# Altium PCB sensor_PCB2A.PcbDoc
Units mil, origin at the board's own origin, x right, y up, seen from the top; angles counter-clockwise.
Board outline 1930 x 2505 mil, 2 copper layers (Top Layer, Bottom Layer); 1 components, 40 nets, 40 pads, 72 vias.
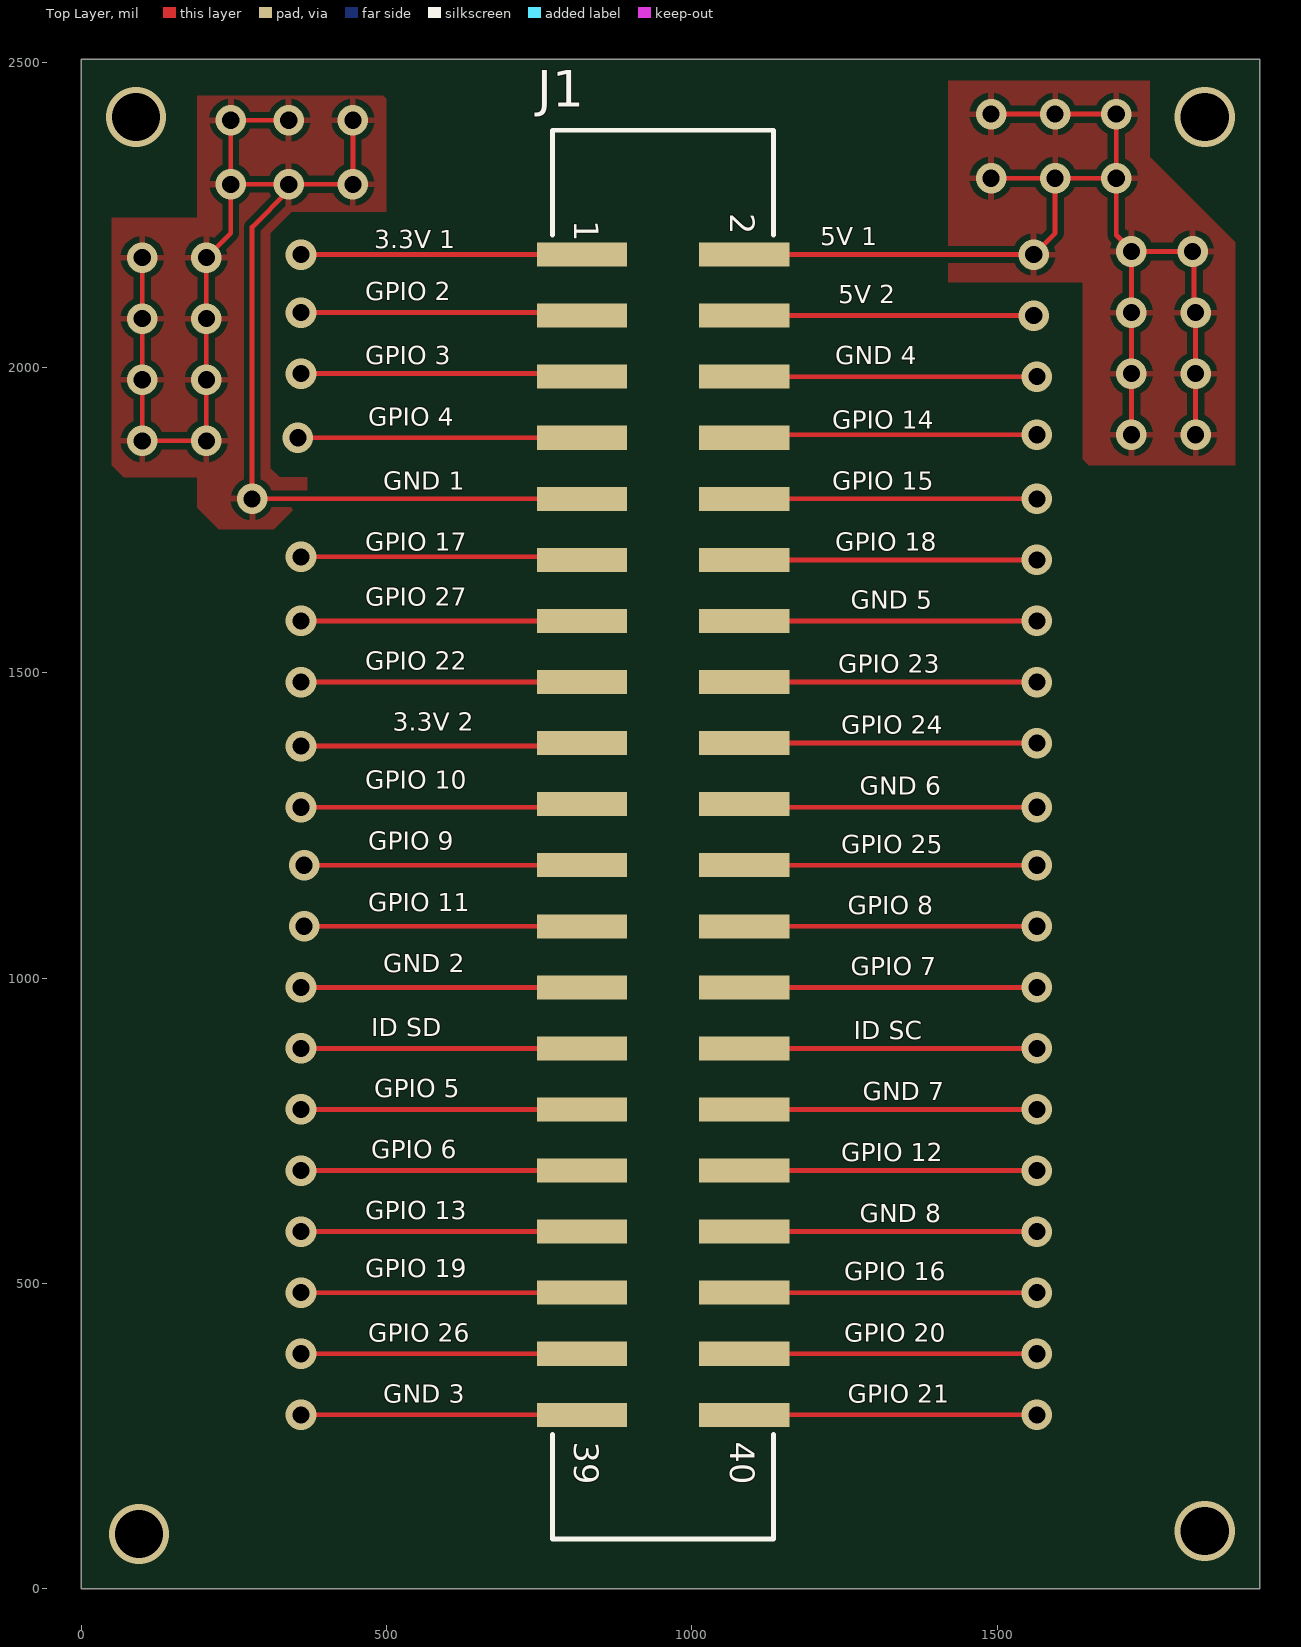
[diagram p0: Top Layer view]
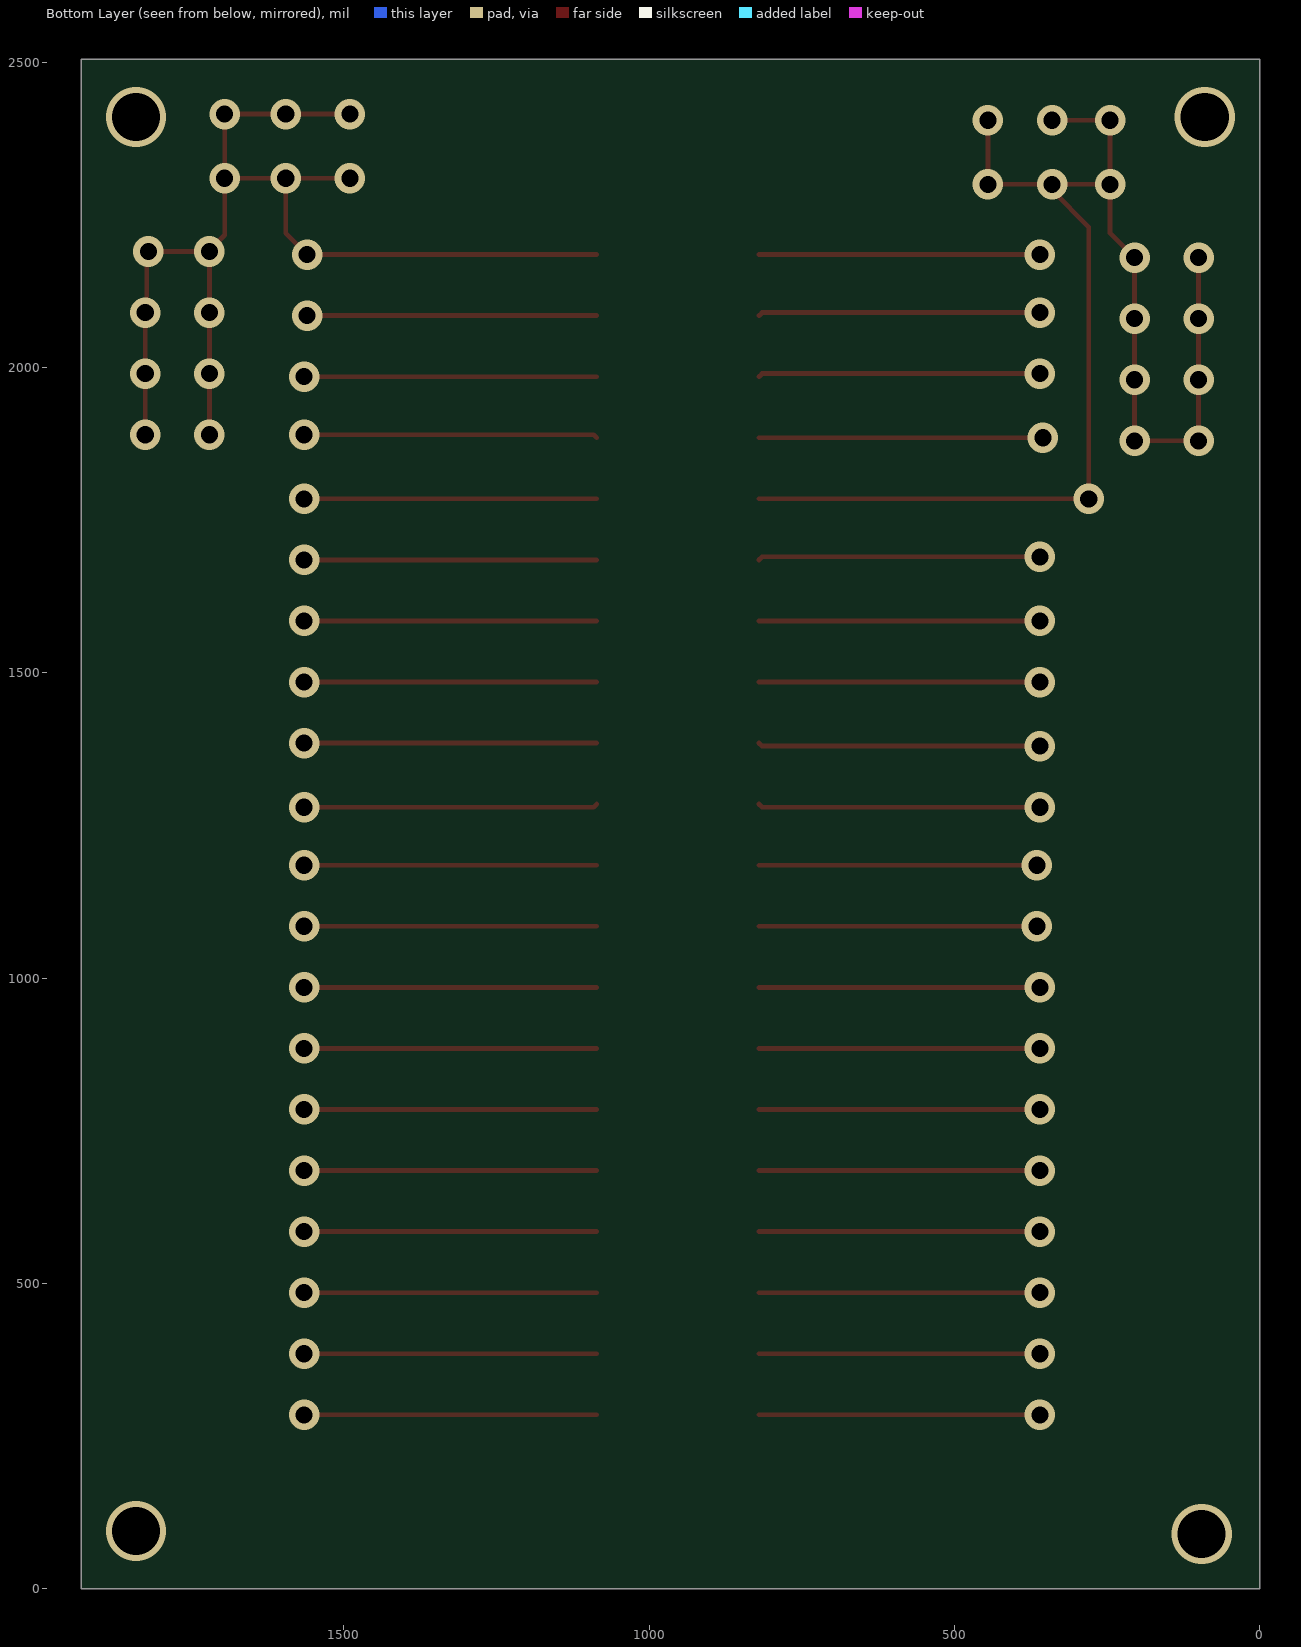
[diagram p1: Bottom Layer view, seen from below]

## Layer stack, top to bottom
Top Solder: solder mask 0.4, Solder Resist, Dk 3.5
Top Layer: signal copper 1.4
Dielectric 1: dielectric 12.6, FR-4, Dk 4.8
Bottom Layer: signal copper 1.4
Bottom Solder: solder mask 0.4, Solder Resist, Dk 3.5

## Board outline
0,0 1930,0 1930,2505 0,2505

## Design rules (kind name [scope] priority, off if disabled: settings)
Clearance [All] p1: gap=9.84 ignorepadtopadclearanceinfootprint=FALSE
NetAntennae [All] p1 off: netantennaetolerance=0
PolygonConnect [All] p1: connectstyle=Relief reliefconductorwidth=10 reliefentries=4 polygonreliefangle="90 Angle" airgapwidth=10
RoutingVias [All] p1: holewidth=28 width=50 viastyle="Through Hole" minholewidth=28 minwidth=50 maxholewidth=28 maxwidth=50
SilkToSolderMaskClearance [IsPad] p1: minsilkscreentomaskgap=8 clearancetoexposedcopper=TRUE
SolderMaskExpansion [All] p1: expansion=4 istentingtop=FALSE
Width [All] p1: maxlimit=7.87 minlimit=3.94 preferedwidth=7.87
28 further rules are at their usual default settings.

## Components (designator, comment, footprint, x,y, rotation, side; value= is the part's Value field where it differs from the comment)
J1 "61234020621" 61234020621 952.87,1235 r270 top

## Footprints (in the part's own frame and the unit in brackets; to place one, negate y for a bottom-side part, rotate by r counter-clockwise, add the part's x,y. Pads: shape width x height; smd on the part's side, far side on the other; paste and mask are expansions set on the pad)
61234020621 [mm] "WR-BHD 2.54mm Male SMT Box Header (Reel), 40p"
  rect 1x3.75 smd: 1(-24.13,-3.375) 2(-24.13,3.375) 3(-21.59,-3.375) 4(-21.59,3.375) 5(-19.05,-3.375) 6(-19.05,3.375) 7(-16.51,-3.375) 8(-16.51,3.375) 9(-13.97,-3.375) 10(-13.97,3.375) 11(-11.43,-3.375) 12(-11.43,3.375) 13(-8.89,-3.375) 14(-8.89,3.375) 15(-6.35,-3.375) 16(-6.35,3.375) 17(-3.81,-3.375) 18(-3.81,3.375) 19(-1.27,-3.375) 20(-1.27,3.375) 21(1.27,-3.375) 22(1.27,3.375) 23(3.81,-3.375) 24(3.81,3.375) 25(6.35,-3.375) 26(6.35,3.375) 27(8.89,-3.375) 28(8.89,3.375) 29(11.43,-3.375) 30(11.43,3.375) 31(13.97,-3.375) 32(13.97,3.375) 33(16.51,-3.375) 34(16.51,3.375) 35(19.05,-3.375) 36(19.05,3.375) 37(21.59,-3.375) 38(21.59,3.375) 39(24.13,-3.375) 40(24.13,3.375)
  silkscreen extent -29.3,-4.6 29.3,4.6, body extent -29.21,-4.75 29.21,4.75, height 10.55

## Part data
J1: library part CMP-1502-00066-1, "Male Box Header WR-BHD, SMT, Vertical, pitch 2.54 mm, 40 pins", Contact Resistance=20mOhm, Manufacturer="Wurth Elektronik", Operating Temperature=-40to125degC, Withstanding Voltage=500VAC, Working Voltage=250VAC, Datasheet URL=https://katalog.we-online.de/em/datasheet/6123xx20621.pdf, Gender=Male, Manufacturer URL=http://www.we-online.de, Mounting Technology=SMT, Orientation=Vertical, Package Reference=61234020621, Packaging=TapeandReel, Part Number=61234020621, Pin Number=40, Pitch=2.54mm, Published Date=August2018, Publisher=WurthElektronik

## Via types
v1: diameter 50, hole 28, Top Layer to Bottom Layer, 68 vias
v2: diameter 98.43, hole 78.74, Top Layer to Bottom Layer, 4 vias

## Nets (pads, with @x,y where several pads share a name; then routed paths per layer and width w, separated by ;. In a path a pad name is that pad's centre, name@x,y a point inside that pad or via, vN(x,y) a via of type N, cw(c..) or ccw(c..) an arc to the next point about the centre after c; other vN are vias at no path point)
3.3V1: J1.1 | length 460
  Top Layer w7.87: v1(360,2185) J1.1
3.3V2: J1.17 | length 462.1
  Top Layer w7.87: v1(360,1380) 815,1380 J1.17
5V1: J1.2 | length 1944.7
  Top Layer w7.87: J1.2 v1@1540,2185 ; v1(1490,2310) v1(1595,2310) ; v1(1490,2415) v1(1595,2415) v1(1695,2415) v1(1695,2310) ; v1(1560,2185) 1595,2220 v1(1595,2310) ; v1@1717.5,2087.5 v1(1720,2090) ; v1(1720,1890) v1(1720,1990) v1(1720,2090) ; v1(1825,1890) v1(1825,1990) v1(1825,2090) 1822.5,2092.5 1822.5,2187.5 v1(1820,2190) v1(1720,2190) ; v1(1595,2310) v1(1695,2310) ; v1(1695,2310) 1695,2217.06 1720,2192.06 v1(1720,2190) ; v1(1720,2090) v1(1720,2190)
5V2: J1.4 | length 474.3
  Top Layer w7.87: J1.4 v1(1560,2085)
GND1: J1.9 | length 2426.4
  Top Layer w7.87: v1(100,2180) v1(100,2080) v1(100,1980) v1(100,1880) v1(205,1880) v1(205,1980) v1(205,2080) v1(205,2180) 245,2220 v1(245,2300) ; v1(340,2405) v1(245,2405) v1(245,2300) ; v1(445,2405) v1(445,2300) v1(340,2300) ; J1.9 v1(280,1785) 280,2230 340,2290 v1(340,2300) ; v1(245,2300) v1(340,2300)
GND2: J1.25 | length 460
  Top Layer w7.87: v1(360,985) J1.25
GND3: J1.39 | length 450
  Top Layer w7.87: v1@370,285 J1.39
  other v1: 360,285
GND4: J1.6 | length 479.3
  Top Layer w7.87: J1.6 v1(1565,1985)
GND5: J1.14 | length 479.3
  Top Layer w7.87: J1.14 v1(1565,1585)
GND6: J1.20 | length 481.3
  Top Layer w7.87: J1.20 1090.75,1280 v1(1565,1280)
GND7: J1.30 | length 479.3
  Top Layer w7.87: J1.30 v1(1565,785)
GND8: J1.34 | length 479.3
  Top Layer w7.87: J1.34 v1(1565,585)
GPIO2: J1.3 | length 462.1
  Top Layer w7.87: v1(360,2090) 815,2090 J1.3
GPIO3: J1.5 | length 462.1
  Top Layer w7.87: v1(360,1990) 815,1990 J1.5
GPIO4: J1.7 | length 465
  Top Layer w7.87: v1(355,1885) J1.7
GPIO6: J1.31 | length 450
  Top Layer w7.87: v1@370,685 J1.31
  other v1: 360,685
GPIO7: J1.26 | length 479.3
  Top Layer w7.87: J1.26 v1(1565,985)
GPIO8: J1.24 | length 479.3
  Top Layer w7.87: J1.24 v1(1565,1085)
GPIO9: J1.21 | length 455
  Top Layer w7.87: v1(365,1185) J1.21
GPIO10: J1.19 | length 462.1
  Top Layer w7.87: v1(360,1280) 815,1280 J1.19
GPIO11: J1.23 | length 455
  Top Layer w7.87: v1(365,1085) J1.23
GPIO12: J1.32 | length 479.3
  Top Layer w7.87: J1.32 v1(1565,685)
GPIO13: J1.33 | length 450
  Top Layer w7.87: v1@370,585 J1.33
  other v1: 360,585
GPIO14: J1.8 | length 481.3
  Top Layer w7.87: J1.8 1090.75,1890 v1(1565,1890)
GPIO15: J1.10 | length 479.3
  Top Layer w7.87: J1.10 v1(1565,1785)
GPIO16: J1.36 | length 479.3
  Top Layer w7.87: J1.36 v1(1565,485)
GPIO17: J1.11 | length 462.1
  Top Layer w7.87: v1(360,1690) 815,1690 J1.11
GPIO18: J1.12 | length 479.3
  Top Layer w7.87: J1.12 v1(1565,1685)
GPIO19: J1.35 | length 450
  Top Layer w7.87: v1@370,485 J1.35
  other v1: 360,485
GPIO20: J1.38 | length 479.3
  Top Layer w7.87: J1.38 v1(1565,385)
GPIO21: J1.40 | length 479.3
  Top Layer w7.87: J1.40 v1(1565,285)
GPIO22: J1.15 | length 460
  Top Layer w7.87: v1(360,1485) J1.15
GPIO23: J1.16 | length 479.3
  Top Layer w7.87: J1.16 v1(1565,1485)
GPIO24: J1.18 | length 479.3
  Top Layer w7.87: J1.18 v1(1565,1385)
GPIO25: J1.22 | length 479.3
  Top Layer w7.87: J1.22 v1(1565,1185)
GPIO26: J1.37 | length 450
  Top Layer w7.87: v1@370,385 J1.37
  other v1: 360,385
GPIO27: J1.13 | length 460
  Top Layer w7.87: v1(360,1585) J1.13
"GPIO 5": J1.29 | length 450
  Top Layer w7.87: v1@370,785 J1.29
  other v1: 360,785
"ID SC": J1.28 | length 479.3
  Top Layer w7.87: J1.28 v1(1565,885)
"ID SD": J1.27 | length 460
  Top Layer w7.87: v1(360,885) J1.27
copper on no net:
  other v2: 95,90 1840,95 90,2410 1840,2410

## Polygon pours and split planes (outlines as drawn)
GND1 on Top Layer "GND1_L01_P008" (solid, remove dead copper, pour order 8): 190,2445 190,2245 50,2245 50,1840 70,1820 190,1820 190,1770 225,1735 315,1735 370,1790 370,1820 325,1820 310,1835 310,2220 345,2255 500,2255 500,2440 495,2445
5V1 on Top Layer "5V1_L01_P002" (solid, remove dead copper, pour order 2): 1420,2470 1750,2470 1750,2345 1890,2205 1890,1840 1650,1840 1640,1850 1640,2140 1420,2140

## Silkscreen, mask and mechanical layers (free items; w line width, h text height)
Top Overlay:
  text "5V 1" at 1210,2200 h30
  text "3.3V 1" at 480,2195 h30
  text "GPIO 2" at 465,2110 h30
  text "5V 2" at 1240,2105 h30
  text "GPIO 3" at 465,2005 h30
  text "GND 4" at 1235,2005 h30
  text "GPIO 4" at 470,1905 h30
  text "GPIO 14" at 1230,1900 h30
  text "GND 1" at 495,1800 h30
  text "GPIO 15" at 1230,1800 h30
  text "GPIO 17" at 465,1700 h30
  text "GPIO 18" at 1235,1700 h30
  text "GPIO 27" at 465,1610 h30
  text "GND 5" at 1260,1605 h30
  text "GPIO 22" at 465,1505 h30
  text "GPIO 23" at 1240,1500 h30
  text "3.3V 2" at 510,1405 h30
  text "GPIO 24" at 1245,1400 h30
  text "GPIO 10" at 465,1310 h30
  text "GND 6" at 1275,1300 h30
  text "GPIO 9" at 470,1210 h30
  text "GPIO 25" at 1245,1205 h30
  text "GPIO 11" at 470,1110 h30
  text "GPIO 8" at 1255,1105 h30
  text "GND 2" at 495,1010 h30
  text "GPIO 7" at 1260,1005 h30
  text "ID SD" at 475,905 h30
  text "ID SC" at 1265,900 h30
  text "GPIO 5" at 480,805 h30
  text "GND 7" at 1280,800 h30
  text "GPIO 6" at 475,705 h30
  text "GPIO 12" at 1245,700 h30
  text "GPIO 13" at 465,605 h30
  text "GND 8" at 1275,600 h30
  text "GPIO 19" at 465,510 h30
  text "GPIO 16" at 1250,505 h30
  text "GPIO 26" at 470,405 h30
  text "GPIO 20" at 1250,405 h30
  text "GND 3" at 495,305 h30
  text "GPIO 21" at 1255,305 h30

## Text inside footprints (layer, text, board x,y; h text height)
J1: Top Overlay "40" at 1063.11,240.91 h40 r270; Top Overlay "39" at 807.2,240.91 h40 r270; Top Overlay "1" at 807.2,2240.91 h40 r270; Top Overlay "2" at 1063.11,2252.72 h40 r270